# Altium PCB NBM.PcbDoc
Units mm, origin at the board's own origin, x right, y up, seen from the top; angles counter-clockwise.
Board outline 21.3 x 24.8 mm, 2 copper layers (Top Layer, Bottom Layer), stack 1.671 mm thick; 17 components, 21 nets, 55 pads, 5 vias.
Unrouted connection lines stored in the file: 1.
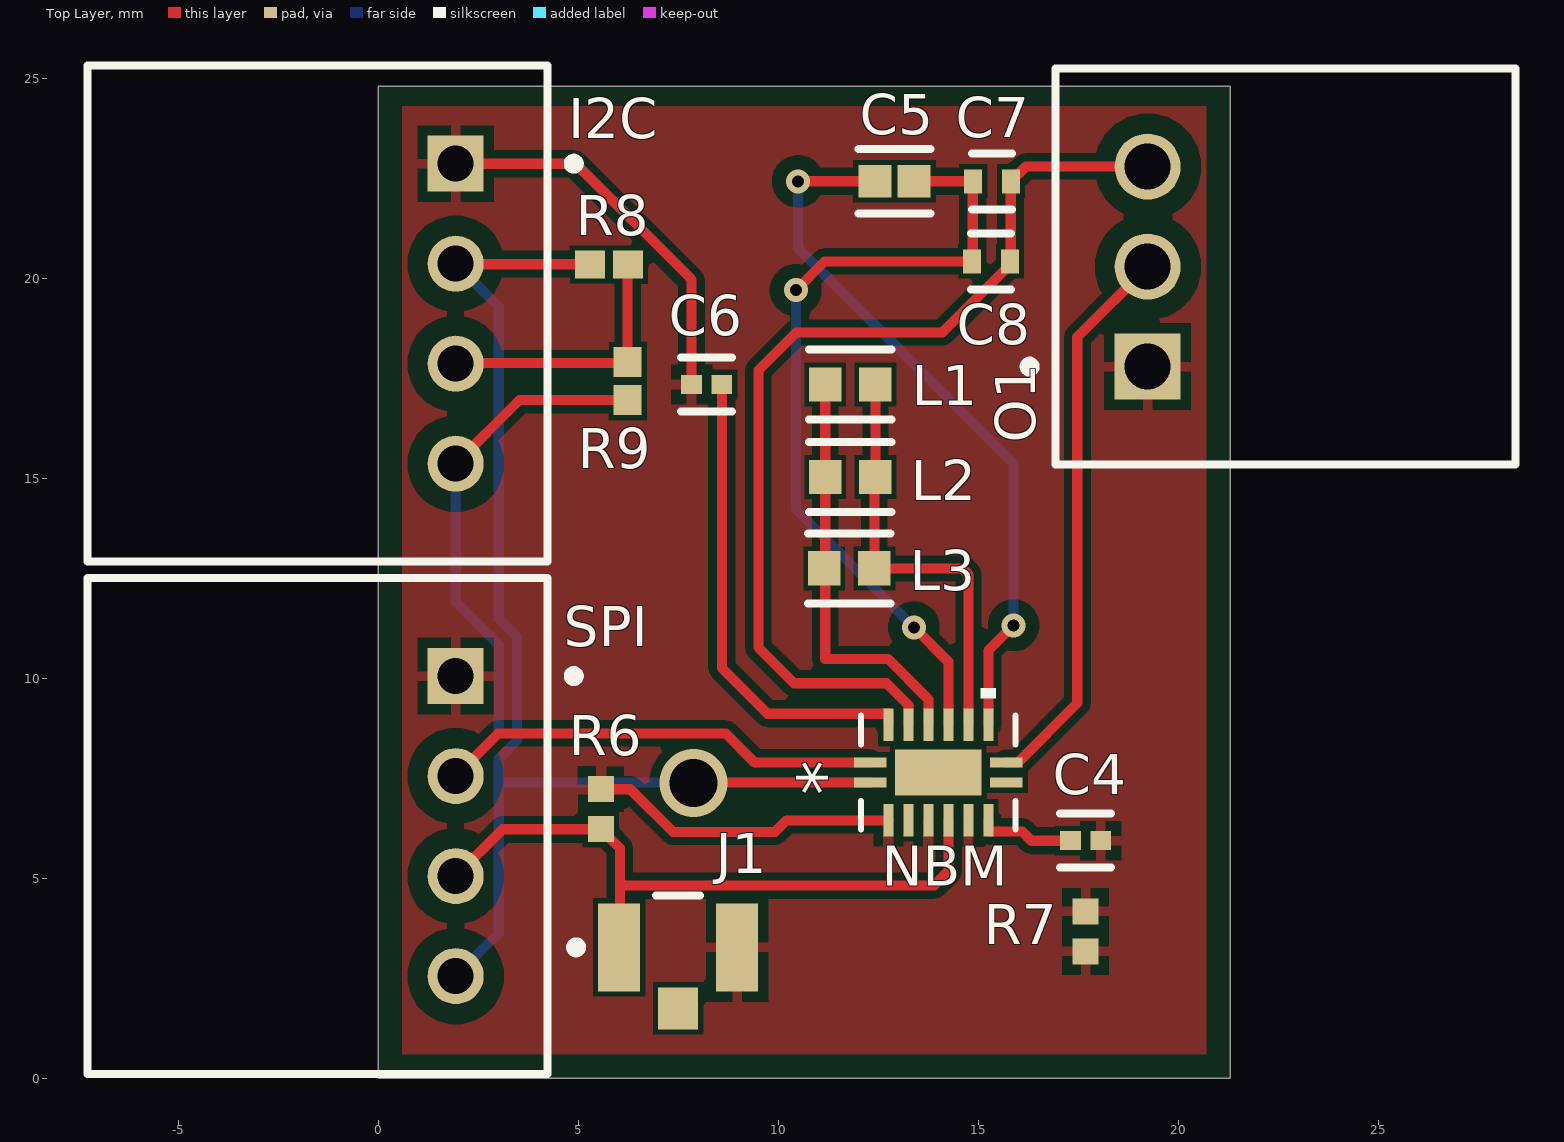
[diagram p0: Top Layer view]
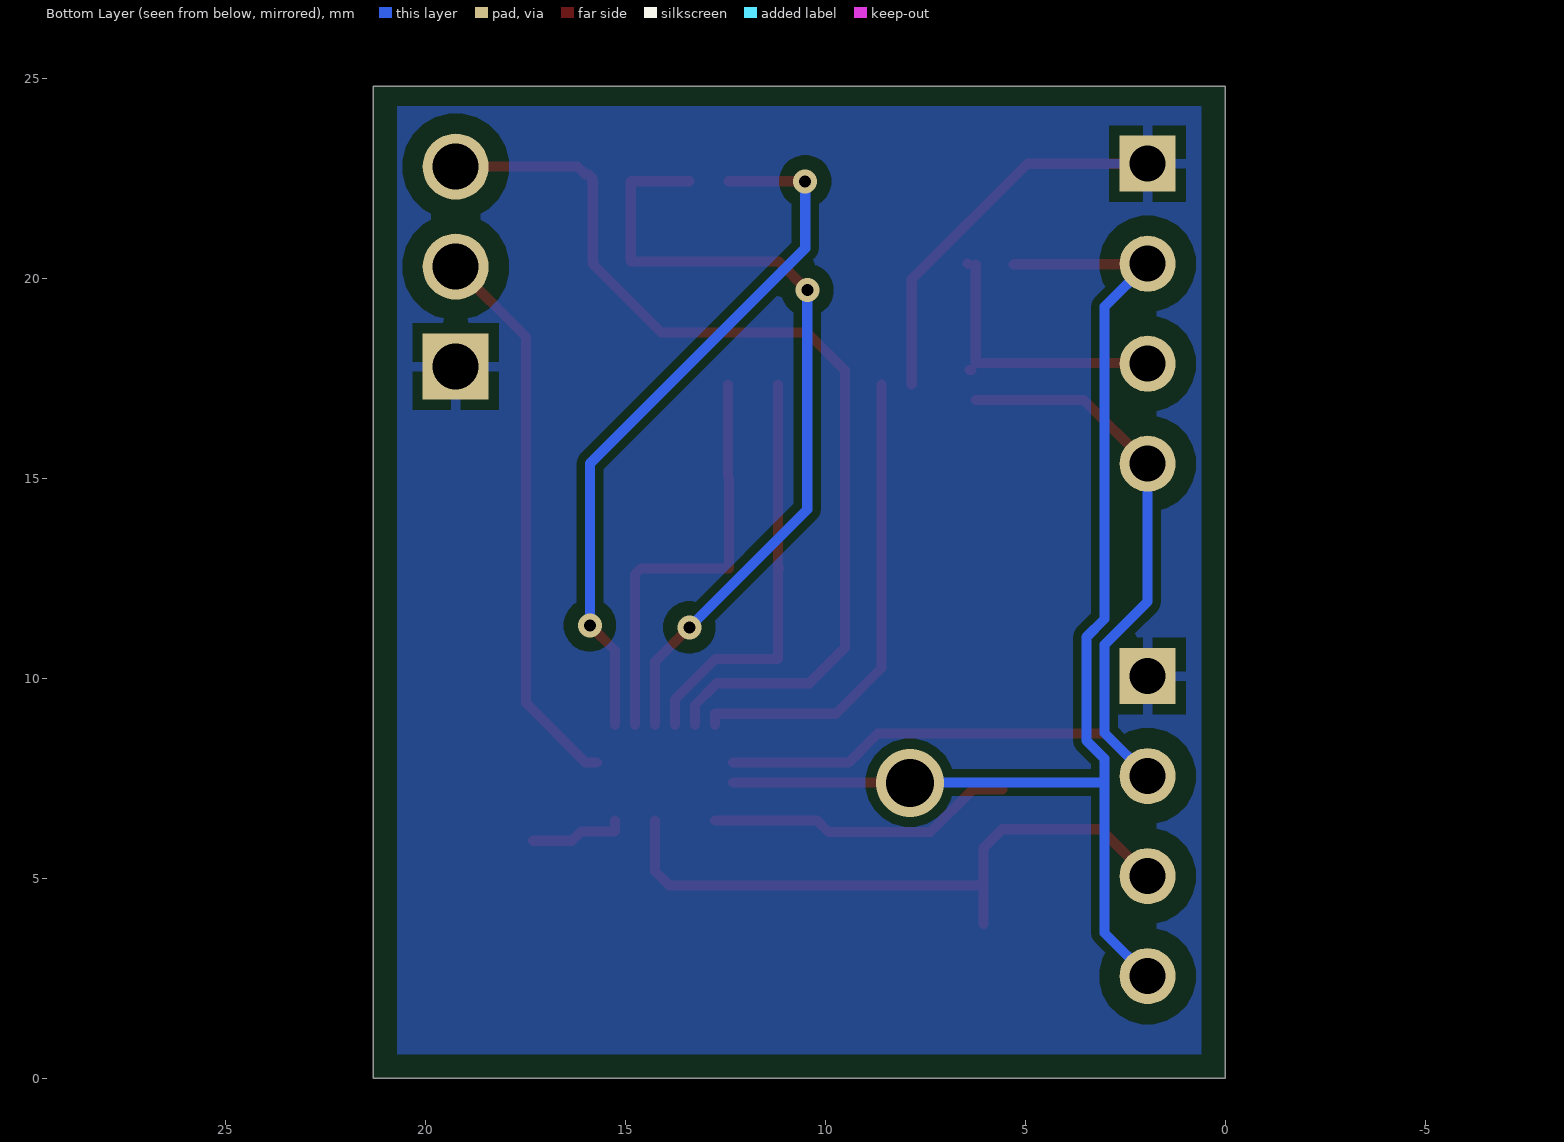
[diagram p1: Bottom Layer view, seen from below]
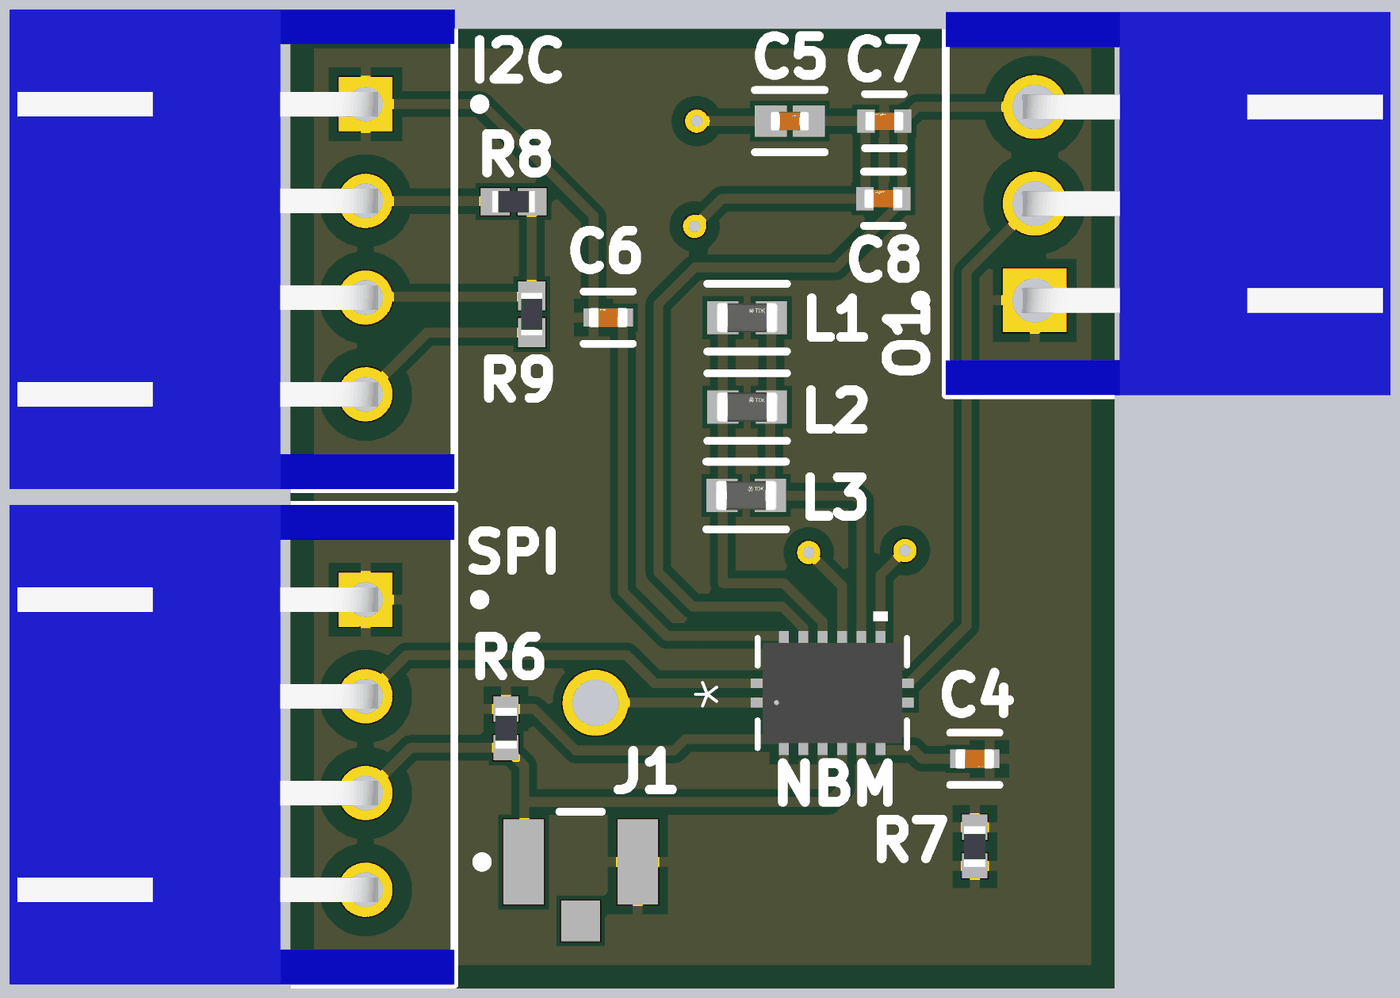
[diagram p2: 3D render of the assembled board from above, using the file's embedded part models]

## Layer stack, top to bottom
Top Solder: solder mask 0.0102, Solder Resist, Dk 3.5
Top Layer: signal copper 0.0356
Dielectric 1: dielectric 1.6, FR-4, Dk 4.8
Bottom Layer: signal copper 0.0356
Bottom Solder: solder mask 0.0102, Solder Resist, Dk 3.5

## Board outline
0,24.8 21.3,24.8 21.3,0 0,0

## Design rules (kind name [scope] priority, off if disabled: settings)
AssemblyTestpoint [All] p1: testpointundercomponent=TRUE minsize=1.016 maxsize=2.54 preferedsize=1.524 minholesize=0 maxholesize=1.016 preferedholesize=0.813 testpointgrid=0.025 usegrid=TRUE gridoriginx=25.4 gridoriginy=25.4 gridtolerance=0 allowsidetop=TRUE allowsidebottom=TRUE
Clearance Clearance_1 [OnMid vs OnMid] p1: gap=0.2 ignorepadtopadclearanceinfootprint=FALSE except(0.127: SMDPad-SMDPad SMDPad-THPad SMDPad-Via SMDPad-Fill SMDPad-Poly SMDPad-Region; 0.254: Arc-Via Track-Via Via-Via Via-Text Hole-Hole; 0.5: Arc-Hole Track-Hole SMDPad-Hole THPad-THPad THPad-Via THPad-Fill THPad-Poly THPad-Region THPad-Hole Via-Hole Fill-Hole Poly-Hole Region-Hole Text-Hole)
Clearance Clearance_2 [(ExistsOnLayer('Top Layer') Or ExistsOnLayer('Bottom Layer')) vs (ExistsOnLayer('Top Layer') Or ExistsOnLayer('Bottom Layer'))] p2: gap=0.2 ignorepadtopadclearanceinfootprint=FALSE except(0.127: SMDPad-SMDPad SMDPad-THPad SMDPad-Via SMDPad-Fill SMDPad-Poly SMDPad-Region; 0.254: Arc-Via Track-Via Via-Via Via-Text Hole-Hole; 0.5: Arc-Hole Track-Hole SMDPad-Hole THPad-THPad THPad-Via THPad-Fill THPad-Poly THPad-Region THPad-Hole Via-Hole Fill-Hole Poly-Hole Region-Hole Text-Hole)
Clearance Clearance_3 [OnMid vs OnMid] p3: gap=0.254 ignorepadtopadclearanceinfootprint=FALSE
Clearance Clearance_4 [(ExistsOnLayer('Top Layer') Or ExistsOnLayer('Bottom Layer')) vs (ExistsOnLayer('Top Layer') Or ExistsOnLayer('Bottom Layer'))] p4: gap=0.254 ignorepadtopadclearanceinfootprint=FALSE
Clearance [All] p5: gap=0.254 ignorepadtopadclearanceinfootprint=FALSE
FabricationTestpoint [All] p1: side=3 testpointundercomponent=TRUE minsize=1.016 maxsize=2.54 preferedsize=1.524 minholesize=0 maxholesize=1.016 preferedholesize=0.813 testpointgrid=0.025 allowsidetop=TRUE allowsidebottom=TRUE usegrid=TRUE gridoriginx=25.4 gridoriginy=25.4 gridtolerance=0
HoleSize [All] p1: absolutevalues=TRUE maxlimit=6.3 minlimit=0.3 maxpercent=80.000 minpercent=20.000
HoleToHoleClearance [All] p1: gap=0.5 allowstackedmicrovias=TRUE
MinimumSolderMaskSliver [All] p1: minsoldermaskwidth=0.05
PolygonConnect [All] p1: connectstyle=Relief reliefconductorwidth=0.254 reliefentries=4 polygonreliefangle="90 Angle" airgapwidth=0.254
RoutingVias [All] p1: holewidth=0.3 width=0.5 viastyle="Through Hole" minholewidth=0.3 minwidth=0.5 maxholewidth=3 maxwidth=5
SilkToSilkClearance [All] p1: silktosilkclearance=0.1
SilkToSolderMaskClearance [IsPad] p1: minsilkscreentomaskgap=0.1 clearancetoexposedcopper=TRUE
SolderMaskExpansion [All] p1: expansion=0.038 istentingtop=FALSE useseparateexpansions=TRUE expansionbottom=0.038 istentingbottom=FALSE soldermaskfromhole=TRUE
Width [All] p1: maxlimit=0.254 minlimit=0.254 preferedwidth=0.254
23 further rules are at their usual default settings.

## Classes and differential pairs
component class NBM: C4 C5 C6 C7 C8 J1 L1 L2 L3 NBM R6 R7 R8 R9

## Components (designator, comment, footprint, x,y, rotation, side; value= is the part's Value field where it differs from the comment)
C4 "GRM155Z71A105KE01D" FP-GRM155-0_1-IPC_C 17.686,5.935 r0 top value=1µF
C5 "GRM155R60J106ME44D" FP-GRM155-0_2-IPC_A 12.904,22.419 r0 top value=10µF
C6 "GRM155Z71A105KE01D" FP-GRM155-0_1-IPC_C 8.212,17.339 r180 top value=1µF
C7 "GRM158R61A226ME15D" FP-GRM158-0_2-MFG 15.349,22.419 r180 top value=22µF
C8 "GRM158R61A226ME15D" FP-GRM158-0_2-MFG 15.324,20.413 r180 top value=22µF
I2C "Header" JST-S4B-XH-A(LF)(SN)_V 1.938,19.108 r270 top
J1 "U.FL-R-SMT(10)" HRS-U.FL-R-SMT_V 7.499,3.268 r0 top
L1 "MLZ1608N150LTD25" FP-MLZ1608-IPC_C 11.802,17.339 r0 top value=15µH
L2 "MLZ1608N150LTD25" FP-MLZ1608-IPC_C 11.802,15.028 r0 top value=15µH
L3 "MLZ1608N150LTD25" FP-MLZ1608-IPC_C 11.776,12.742 r0 top value=15µH
NBM "NBM7100ABQX" DHVQFN16_NEX 14.003,7.636 r90 top
O1 "Header" JST-S3B-XH-A(LF)(SN)_V 19.235,20.286 r90 top
R6 "Resistor 100k +/-1% 0402 63 mW" RESC1005X40X25ML05T05 5.57,6.722 r270 top value=100k
R7 "Resistor 100k +/-1% 0402 63 mW" RESC1005X40X25ML05T05 17.686,3.666 r270 top value=100k
R8 "Resistor 1k +/-5% 0402 63 mW" RESC1005X40X25ML10T10 5.766,20.336 r0 top value=1k
R9 "Resistor 1k +/-5% 0402 63 mW" RESC1005X40X25ML10T10 6.235,17.428 r270 top value=1k
SPI "Header" JST-S4B-XH-A(LF)(SN)_V 1.938,6.299 r270 top

## Footprints (in the part's own frame and the unit in brackets; to place one, negate y for a bottom-side part, rotate by r counter-clockwise, add the part's x,y. Pads: shape width x height; smd on the part's side, far side on the other; paste and mask are expansions set on the pad)
DHVQFN16_NEX [mil]
  rect 10x32 smd paste+0 mask+0: 1(-9.84,67) 8(-9.84,-67) 9(9.84,-67) 16(9.84,67)
  rect 32x10 smd paste+0 mask+0: 2(-47,49.21) 3(-47,29.53) 4(-47,9.84) 5(-47,-9.84) 6(-47,-29.53) 7(-47,-49.21) 10(47,-49.21) 11(47,-29.53) 12(47,-9.84) 13(47,9.84) 14(47,29.53) 15(47,49.21)
  rect 45x85 smd paste+0 mask+0: 17(0,0)
  silkscreen extent -56,-76 83,76, body extent -51,-71 51,71, height 39
FP-GRM155-0_1-IPC_C [mm]
  rect 0.515x0.472 smd paste+0 mask+0: 1(-0.379,0) 2(0.379,0)
  silkscreen extent -0.64,-0.67 0.64,0.67, body extent -0.74,-0.38 0.74,0.38, height 0.25
FP-GRM155-0_2-IPC_A [mm]
  rect 0.828x0.806 smd paste+0 mask+0: 2(0.489,0) ""(-0.489,0)
  silkscreen extent -0.9,-0.8 0.9,0.8, body extent -1.1,-0.6 1.1,0.6, height 0.25
FP-GRM158-0_2-MFG [mm]
  rect 0.45x0.6 smd paste+0 mask+0: 1(-0.475,0) 2(0.475,0)
  silkscreen extent -0.5,-0.7 0.5,0.7, body extent -0.8,-0.45 0.8,0.45, height 0.25
FP-MLZ1608-IPC_C [mm]
  rect 0.806x0.858 smd paste+0 mask+0: 1(-0.626,0) 2(0.626,0)
  silkscreen extent -1.03,-0.87 1.03,0.87, body extent -1.13,-0.58 1.13,0.58, height 0.25
HRS-U.FL-R-SMT_V [mm] "SMD, 3-Leads, Body 2.6x2.6mm"
  rect 1.05x2.2 smd: 1(-1.475,0) 2(1.475,0)
  rect 1x1.05 smd: 3(0,-1.525)
  silkscreen extent -2.67,-0.12 0.55,1.3, body extent -1.3,-1.3 1.3,1.3, height 1.25
JST-S3B-XH-A(LF)(SN)_V [mm] "Header, 3-Leads, Body 9.9x11.5mm, Pitch 2.5mm"
  rect 1.65x1.65 hole 1.15: 1(-2.5,0)
  round 1.65 hole 1.15: 2(0,0) 3(2.5,0)
  silkscreen extent -4.95,-9.2 4.95,3.07, body extent -4.95,-9.2 4.95,2.3, height 6.15
JST-S4B-XH-A(LF)(SN)_V [mm] "Header, 4-Leads, Body 12.4x11.5mm, Pitch 2.5mm"
  rect 1.4x1.4 hole 0.9: 1(-3.75,0)
  round 1.4 hole 0.9: 2(-1.25,0) 3(1.25,0) 4(3.75,0)
  silkscreen extent -6.2,-9.2 6.2,3.08, body extent -6.2,-9.2 6.2,2.3, height 6.15
RESC1005X40X25ML05T05 [mm] "Chip Resistor, 2-Leads, Body 1.05x0.55mm, IPC Low Density"
  rect 0.65x0.65 smd: 1(-0.5,0) 2(0.5,0)
  body extent -0.53,-0.28 0.53,0.28, height 0.4
RESC1005X40X25ML10T10 [mm] "Chip Resistor, 2-Leads, Body 1.1x0.6mm, IPC Low Density"
  rect 0.75x0.7 smd: 1(-0.475,0) 2(0.475,0)
  body extent -0.55,-0.27 0.55,0.28, height 0.4

## Part data
C4 C6: library part CMP-001-00087-1, "Ceramic Capacitor, Multilayer, Ceramic, 10V, 10% +Tol, 10% -Tol, X7R, 15% TC, 1uF, Surface Mount, 0402", Capacitor Type=Ceramic, Case/Package=0402, Max Operating Temperature=125°C, Min Operating Temperature=-55°C, Mounting Technology="Surface Mount", Pins=2, RoHS Compliant=Yes
C5: library part CMP-001-00089-1, "Ceramic Capacitor, Multilayer, Ceramic, 6.3V, 20% +Tol, 20% -Tol, X5R, 15% TC, 10uF, Surface Mount, 0402", Capacitor Type=Ceramic, Case/Package=0402, Max Operating Temperature=85°C, Min Operating Temperature=-55°C, Mounting Technology="Surface Mount", Pins=2, RoHS Compliant=Yes
C7 C8: library part CMP-001-00090-1, "Ceramic Capacitor, Multilayer, Ceramic, 10V, 20% +Tol, 20% -Tol, X5R, 15% TC, 22uF, Surface Mount, 0402", RoHS Compliant=Yes
I2C SPI: library part CMP-002-00034-2, "Male Header, Pitch 2.5 mm, 1 x 4 Position, Height 6.1 mm, Tail Length 3.4 mm, -25 to 85 degC, RoHS, Bulk", Case/Package=S4B-XH-A(LF)(SN), Manufacturer=JST, Max Operating Temperature=85°C, Min Operating Temperature=-25°C, Package Description="XH Series Disconnectable Crimp Style Connector, Pitch 2.5 mm, 1 x 4 Position, Height 6.1 mm, Tail Length 3.4 mm", Connector Type=Header, Datasheet URL=http://www.jst-mfg.com/product/pdf/eng/eXH.pdf, Datasheet Version=May-16, Gender=Male, Manufacturer URL=http://www.jst.com/home2.html, Mounting Technology=TH, Package Reference=S4B-XH-A(LF)(SN), RoHS Compliant=Unknown
J1: library part CMP-002-00035-2, "Ultra Small Surface Mount Coaxial Connector, 50 Ohm, -40 to 90 degC, 3-Pin SMD, RoHS, Tape and Reel", Case/Package=U.FL-R-SMT, Manufacturer="Hirose Electric", Max Operating Temperature=90°C, Min Operating Temperature=-40°C, Package Description="3-Pin Surface Mount Device, Body 2.6 x 2.6 mm", Package Quantity=2500, Resistance=50Ohm, Connector Type=RF&Coax, Contact Material=Brass, Contact Plating=Gold, Datasheet URL=https://www.hirose.com/product/en/download_file/key_name/U.FL/category/Catalog/doc_file_id/31697/?file_category_id=4&item_id=15&is_series=1, Datasheet Version=Aug-16, Fastening Type=Snap, Impedance=50Ohm, Manufacturer URL=https://www.hirose.com, Mounting Technology=SM, Package Reference=U.FL-R-SMT, Packaging=TapeandReel, RoHS Compliant=True
L1 L2 L3: library part CMP-006-00022-1, "General Purpose Inductor, 15uH, 20%, 1 Element, Ferrite-Core, SMD, 0603"
NBM: "No Description Available", Mfr_Name=Nexperia, Copyright="Copyright (C) 2023 Ultra Librarian. All rights reserved.", Manufacturer_Part_Number=NBM7100ABQX, RefDes=RefDes, Type=DEV
O1: library part CMP-002-00033-2, "Male Header, Pitch 2.5 mm, 1 x 3 Position, Height 6.1 mm, Tail Length 3.4 mm, -25 to 85 degC, RoHS, Bulk, name S3B-XH-A(LF)(SN)", Case/Package=S3B-XH-A(LF)(SN), Manufacturer=JST, Max Operating Temperature=85°C, Min Operating Temperature=-25°C, Package Description="Male Header, Pitch 2.5 mm, 1 x 3 Position, Height 6.1 mm, Tail Length 3.4 mm", Connector Type=Header, Datasheet URL=http://www.jst-mfg.com/product/pdf/eng/eXH.pdf, Datasheet Version=May-16, Gender=Male, Manufacturer URL=http://www.jst.com/home2.html, Mounting Technology=TH, Package Reference=S3B-XH-A(LF)(SN), RoHS Compliant=Unknown
R6 R7: library part CMP-009-00021-5, "Chip Resistor, 100 KOhm, +/- 1%, 0.063 W, -55 to 155 degC, 0402 (1005 Metric)", Case/Package=0402, Max Operating Temperature=155°C, Min Operating Temperature=-55°C, Power=63mW, Tolerance=1%, Voltage Rating=50V, Mounting Technology=SM, Pins=2, RoHS Compliant=True
R8 R9: library part CMP-009-00013-5, "Chip Resistor, 1 KOhm, +/- 5%, 0.063 W, -55 to 155 degC, 0402 (1005 Metric)", Case/Package=0402, Max Operating Temperature=155°C, Min Operating Temperature=-55°C, Power=63mW, Tolerance=5%, Mounting Technology=SM, Pins=2, RoHS Compliant=True

## Via types
v1: diameter 0.6, hole 0.3, Top Layer to Bottom Layer, 4 vias
v2: diameter 1.7, hole 1.2, Top Layer to Bottom Layer, 1 vias

## Nets (pads, with @x,y where several pads share a name; then routed paths per layer and width w, separated by ;. In a path a pad name is that pad's centre, name@x,y a point inside that pad or via, vN(x,y) a via of type N, cw(c..) or ccw(c..) an arc to the next point about the centre after c; other vN are vias at no path point)
BAT_OUT: NBM.10 | length 18
  Top Layer w0.254: v1(10.498,22.419) 12.415,22.419 ; NBM.10 15.253,10.69 v1(15.882,11.319)
  Bottom Layer w0.254: v1(10.498,22.419) 10.498,20.743 15.882,15.358 v1(15.882,11.319)
GND: C4.2 C6.2 I2C.1 J1.2 NBM.2 NBM.4 NBM.6 O1.1 R6.1 R7.1 R7.2 SPI.1 | length 17.5
  Top Layer w0.254: I2C.1 4.942,22.858 7.833,19.967 C6.2 ; R6.1 6.301,7.222 7.371,6.151 9.916,6.151 10.208,6.443 NBM.2
NetC1_2: 
NetC4_1: C4.1 NBM.7 | length 2.4
  Top Layer w0.254: NBM.7 15.253,6.163 16.1,6.163 16.329,5.935 C4.1
NetC6_1: C6.1 NBM.15 | length 12
  Top Layer w0.254: C6.1 8.59,10.25 9.731,9.11 12.753,9.11 NBM.15
NetC7_1: C7.1 C8.1 NBM.14 O1.3 | length 24.9
  Top Layer w0.254: NBM.14 13.253,9.326 12.707,9.872 10.396,9.872 9.507,10.761 9.507,17.695 10.452,18.64 14.101,18.64 15.799,20.338 C8.1 15.811,20.425 15.811,22.407 C7.1 15.824,22.494 15.922,22.592 15.997,22.592 16.19,22.786 O1.3
NetDS1_2: 
NetI2C_2: I2C.2 NBM.1 R8.1 SPI.4 | length 31.9
  Top Layer w0.254: I2C.2@2.079,20.499 I2C.2 1.949,20.347 5.28,20.347 R8.1 ; v2(7.881,7.382) 7.885,7.386 NBM.1
  Bottom Layer w0.254: SPI.4 3.015,3.626 3.015,7.387 ; I2C.2 3.015,19.281 3.015,11.477 3.469,11.023 3.469,8.438 3.015,7.984 3.015,7.387 ; v2@7.881,7.387 3.015,7.387
NetI2C_3: I2C.3 R8.2 R9.1 | length 6.8
  Top Layer w0.254: I2C.3@1.972,17.858 I2C.3 1.96,17.881 6.213,17.881 R9.1 6.235,20.331 R8.2 ; R9.1@6.348,17.7 R9.1@6.388,17.7 ; R8.2@6.426,20.354 R8.2@6.439,20.367
NetI2C_4: I2C.4 NBM.16 R9.2 SPI.2 | length 24.8
  Top Layer w0.254: SPI.2 3.002,8.613 8.687,8.613 9.414,7.886 NBM.16 ; I2C.4 3.533,16.953 R9.2
  Bottom Layer w0.254: SPI.2 3.015,8.626 3.015,10.835 1.938,11.912 I2C.4
NetJ1_1: J1.1 NBM.5 R6.2 SPI.3 | length 16.3
  Top Layer w0.254: SPI.3 3.11,6.222 R6.2 6.044,5.748 6.044,4.902 ; J1.1@6.044,3.859 6.044,4.902 ; NBM.5 14.253,5.169 13.901,4.817 6.129,4.817 6.044,4.902
NetL1_1: L1.1 L2.1 L3.1 NBM.13 | length 10.5
  Top Layer w0.254: L3.1 11.176,12.767 L2.1 L1.1 ; L3.1@11.176,12.742 11.176,10.474 12.746,10.474 13.753,9.468 NBM.13
NetL1_2: L1.2 L2.2 L3.2 NBM.11 | length 10.8
  Top Layer w0.254: L1.2 L2.2 12.403,15.002 L3.2 14.604,12.742 14.753,12.593 NBM.11
NetNBM_9: NBM.9 O1.2 | length 14
  Top Layer w0.254: NBM.9 15.984,7.886 17.476,9.378 17.476,18.526 O1.2
NetNEH1_2: 
NetR2_2: 
NetR3_2: 
NetR4_1: 
NetR5_1: 
SOLAR_IN: 
VSS: C5.2 C7.2 C8.2 NBM.12 | length 20.6
  Top Layer w0.254: v1(10.443,19.698) 11.158,20.413 C8.2 14.861,20.425 14.861,22.407 14.849,22.419 C5.2 ; v1(13.393,11.269) 14.253,10.409 NBM.12
  Bottom Layer w0.254: v1(10.443,19.698) 10.447,19.695 10.447,14.215 v1(13.393,11.269)
pads on no net: C5. J1.3 NBM.3 NBM.8 NBM.17

## Polygon pours and split planes (outlines as drawn)
GND on Bottom Layer "GND_L02_P001" (solid, pour order 1): 0.6,24.3 20.7,24.3 20.7,0.6 0.6,0.6
GND on Top Layer "GND_L01_P000" (solid, pour order 0): 0.6,24.3 20.7,24.3 20.7,0.6 0.6,0.6

## Text inside footprints (layer, text, board x,y; h text height)
NBM: Top 3D Body "*" at 13.342,7.069 h1.27 r90; Top Overlay "*" at 11.742,7.069 h1.27 r90